# Altium PCB PCB1.PcbDoc
Units mil, origin at the board's own origin, x right, y up, seen from the top; angles counter-clockwise.
Board outline 3950 x 5505 mil, 2 copper layers (Top Layer, Bottom Layer); 12 components, 35 nets, 128 pads, 0 vias.
Unrouted connection lines stored in the file: 45.
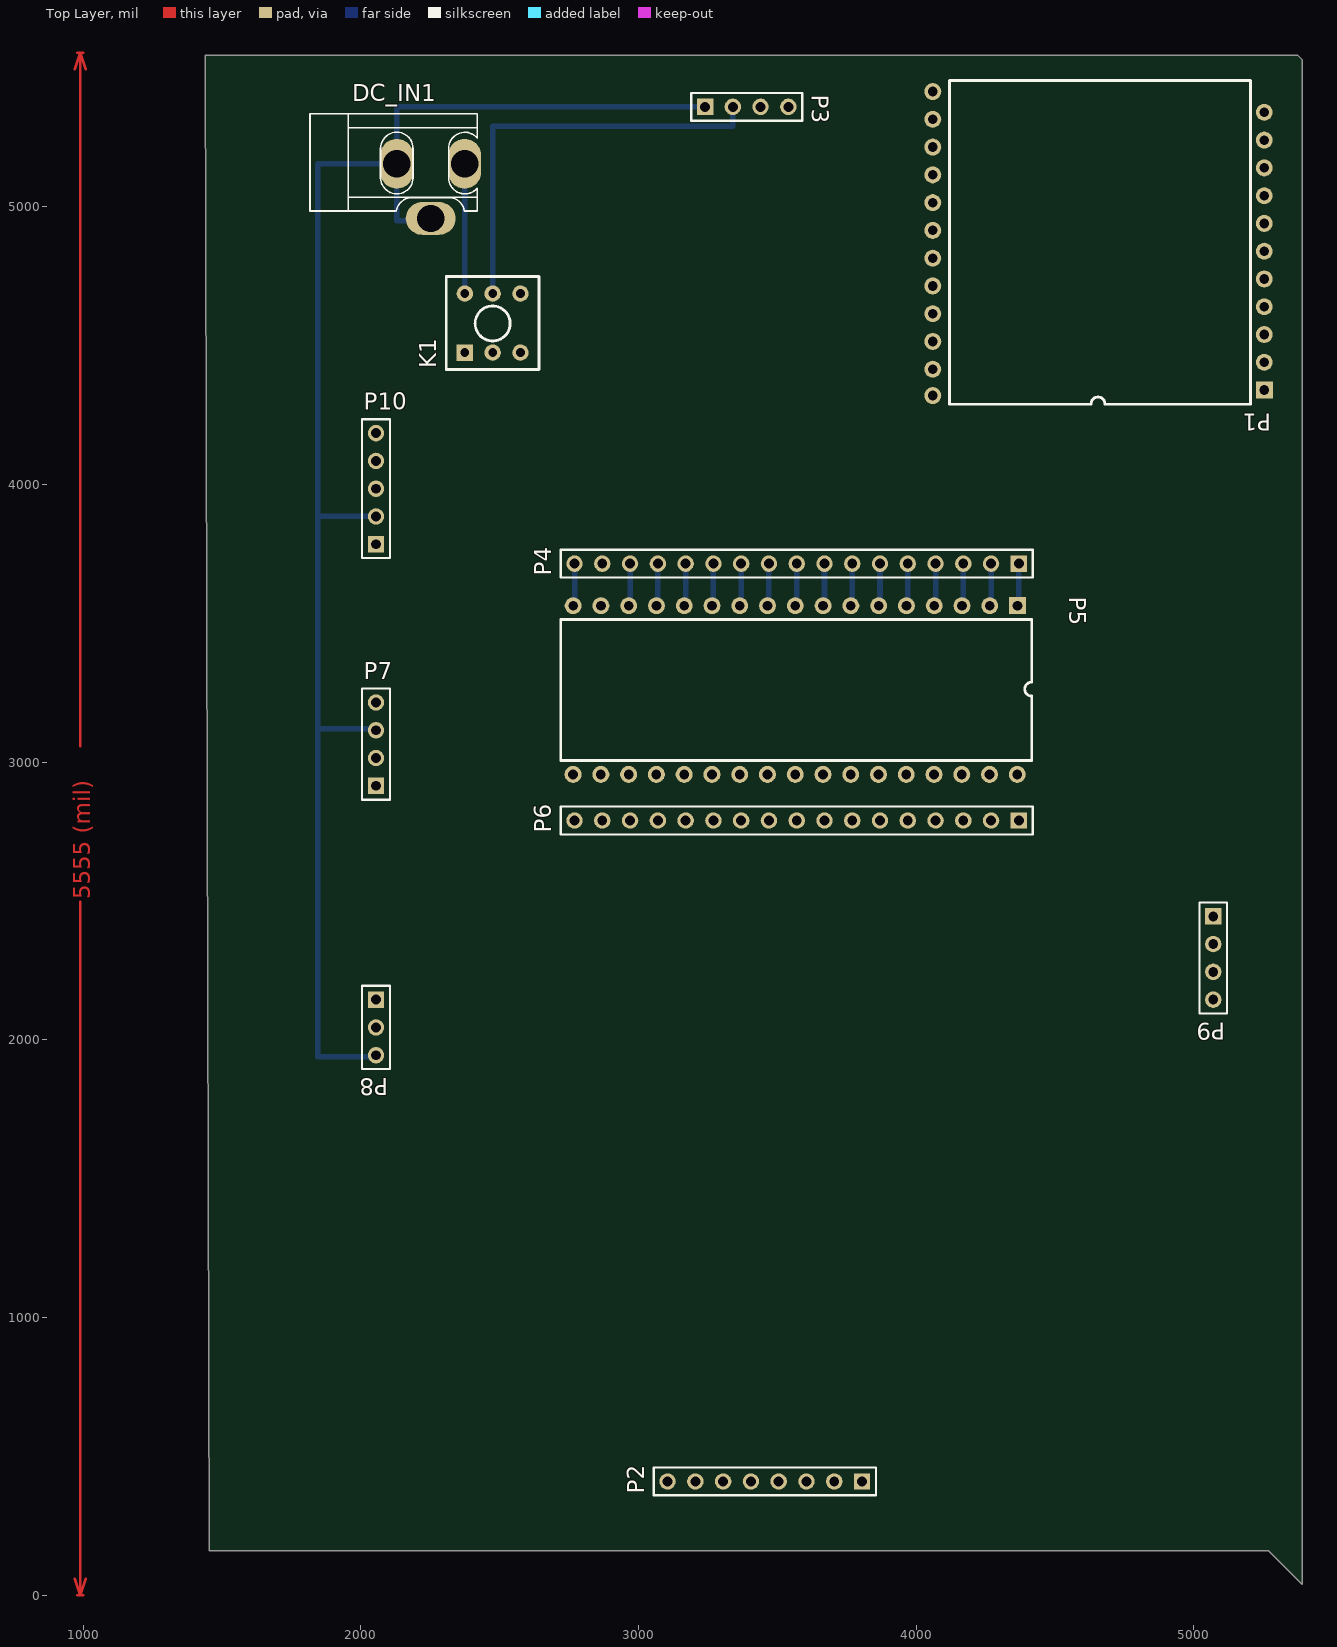
[diagram p0: Top Layer view]
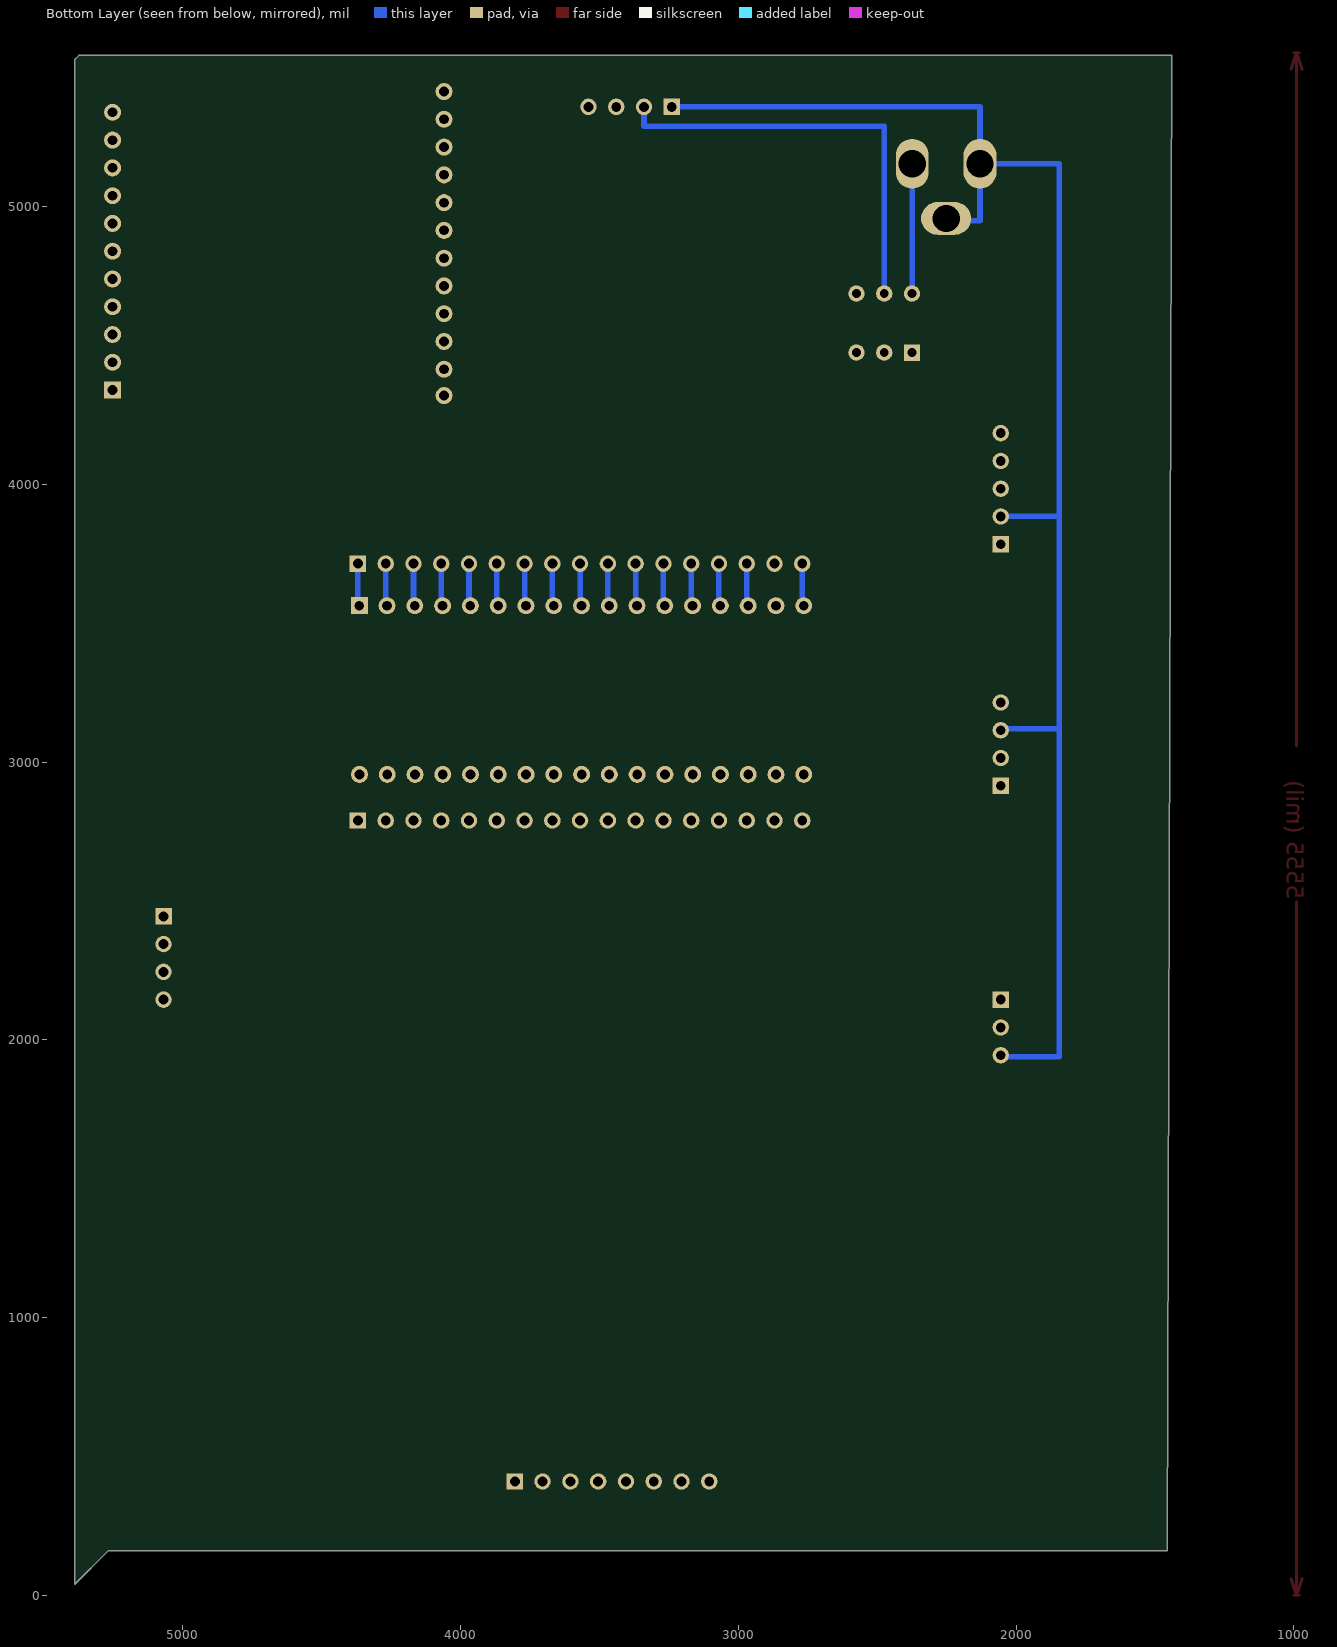
[diagram p1: Bottom Layer view, seen from below]

## Layer stack, top to bottom
Top Layer: signal copper 1.4
Dielectric: dielectric 12.6, FR-4, Dk 4.8
Bottom Layer: signal copper 1.4

## Board outline
1440,5545 5375,5545 5390,5530 5390,40 5270,160 1455,160

## Design rules (kind name [scope] priority, off if disabled: settings)
Clearance [All] p1: gap=10
PolygonConnect [All] p1: connectstyle=Relief reliefconductorwidth=10 reliefentries=4 polygonreliefangle="90 Angle" airgapwidth=10
RoutingCorners [All] p1: cornerstyle=90-Degree minsetback=100 maxsetback=100
RoutingVias [All] p1: holewidth=28 width=50 viastyle="Through Hole" minholewidth=28 minwidth=50 maxholewidth=28 maxwidth=50
SolderMaskExpansion [All] p1: expansion=4
Width [All] p1: maxlimit=30 minlimit=10 preferedwidth=15
27 further rules are at their usual default settings.

## Components (designator, comment, footprint, x,y, rotation, side; value= is the part's Value field where it differs from the comment)
DC_IN1 "POW" DC10B 1955,4985 r0 top
K1 "BUTTON" BTN8.5*8.5 2375,4475 r90 top
P1 "NBLOT" NBLOT 4060,5325 r180 top
P2 "矩阵按键" HDR1X8 3805,410 r180 top
P3 "oled接口" HDR1X4 3240,5360 r0 top
P4 "Header 17" HDR1X17 4370,3715 r180 top
P5 "STM32F103RCT6" stm32最小系统 3410,3260 r270 top
P6 "Header 17" HDR1X17 4370,2790 r180 top
P7 "MQ" HDR1X4 2055,2915 r90 top
P8 "蜂鸣器" HDR1X3 2055,2145 r270 top
P9 "调试" HDR1X4 5070,2445 r270 top
P10 "GPS" HDR1X5 2055,3785 r90 top

## Footprints (in the part's own frame and the unit in brackets; to place one, negate y for a bottom-side part, rotate by r counter-clockwise, add the part's x,y. Pads: shape width x height; smd on the part's side, far side on the other; paste and mask are expansions set on the pad)
BTN8.5*8.5 [mm]
  rect 1.5x1.5 hole 0.8: 1(0,0)
  round 1.5 hole 0.8: 2(0,-2.54) 3(0,-5.08) 4(5.4,-5.08) 5(5.4,-2.54) 6(5.4,0)
  silkscreen extent -1.55,-6.79 6.95,1.71
DC10B [mm]
  oval 3x4.572 hole 2.5: 1(10.645,4.318) 2(4.445,4.318)
  oval 4.572x3 hole 2.5: 3(7.545,-0.682)
  silkscreen extent -3.5,0 11.81,8.89
HDR1X3 [mm] "Connector; Header; 3 Position"
  rect 1.5x1.5 hole 0.9: 1(0,0)
  round 1.5 hole 0.9: 2(2.54,0) 3(5.08,0)
  silkscreen extent -1.27,-1.27 6.35,1.27
HDR1X4 [mm] "Connector; Header; 4 Position"
  rect 1.5x1.5 hole 0.9: 1(0,0)
  round 1.5 hole 0.9: 2(2.54,0) 3(5.08,0) 4(7.62,0)
  silkscreen extent -1.27,-1.27 8.89,1.27
HDR1X5 [mm] "Connector; Header; 5 Position"
  rect 1.5x1.5 hole 0.9: 1(0,0)
  round 1.5 hole 0.9: 2(2.54,0) 3(5.08,0) 4(7.62,0) 5(10.16,0)
  silkscreen extent -1.27,-1.27 11.43,1.27
HDR1X8 [mm] "Connector; Header; 8 Position"
  rect 1.5x1.5 hole 0.9: 1(0,0)
  round 1.5 hole 0.9: 2(2.54,0) 3(5.08,0) 4(7.62,0) 5(10.16,0) 6(12.7,0) 7(15.24,0) 8(17.78,0)
  silkscreen extent -1.27,-1.27 19.05,1.27
HDR1X17 [mm] "Connector; Header; 17 Position"
  rect 1.5x1.5 hole 0.9: 1(0,0)
  round 1.5 hole 0.9: 2(2.54,0) 3(5.08,0) 4(7.62,0) 5(10.16,0) 6(12.7,0) 7(15.24,0) 8(17.78,0) 9(20.32,0) 10(22.86,0) 11(25.4,0) 12(27.94,0) 13(30.48,0) 14(33.02,0) 15(35.56,0) 16(38.1,0) 17(40.64,0)
  silkscreen extent -1.27,-1.27 41.91,1.27
NBLOT [mil]
  round 61 hole 35: 1(0,-90) 2(0,9.98) 3(0,109.96) 4(0,209.93) 5(0,309.91) 6(0,409.89) 7(0,509.87) 8(0,609.85) 9(0,709.82) 10(0,809.8) 11(0,909.78) 12(0,1004.78) 14(-1193.62,884.95) 15(-1193.62,784.93) 16(-1193.62,684.91) 17(-1193.62,584.89) 18(-1193.62,484.87) 19(-1193.62,384.85) 20(-1193.62,284.83) 21(-1193.62,184.81) 22(-1193.62,84.79) 23(-1193.62,-15.23)
  rect 61x61 hole 35: 13(-1193.88,984.97)
  silkscreen extent -1144,-130 -60,1036
stm32最小系统 [mil]
  rect 61x61 hole 35: 1(-303.88,955.19)
  round 61 hole 35: 2(303.87,954.39) 3(-303.63,855.17) 4(303.87,854.42) 5(-303.63,755.15) 6(303.87,754.44) 7(-303.63,655.13) 8(303.87,654.46) 9(-303.63,555.11) 10(303.87,554.48) 11(-303.63,455.09) 12(303.87,454.5) 13(-303.62,355.07) 14(303.87,354.53) 15(-303.62,255.05) 16(303.87,254.55) 17(-303.62,155.03) 18(303.88,154.57) 19(-303.62,55.01) 20(303.88,54.59) 21(-303.62,-45.01) 22(303.88,-45.39) 23(-303.62,-145.03) 24(303.88,-145.36) 25(-303.62,-245.05) 26(303.88,-245.34) 27(-303.62,-345.07) 28(303.88,-345.32) 29(-303.62,-445.09) 30(303.88,-445.3) 31(-303.62,-545.11) 32(303.88,-545.28) 33(-303.62,-645.13) 34(303.88,-645.25)
  silkscreen extent -254,-690 254,1006, body extent -346,-885 346,1111, height 189

## Part data
P1: library part "Header 12X2", "Header, 12-Pin, Dual row"
P2: library part "Header 8", "Header, 8-Pin"
P3 P7 P9: library part "Header 4", "Header, 4-Pin"
P4 P6: "Header, 17-Pin"
P5: library part "Header 17X2", "Header, 17-Pin, Dual row"
P8: library part "Header 3", "Header, 3-Pin"
P10: library part "Header 5", "Header, 5-Pin"

## Nets (pads, with @x,y where several pads share a name; then routed paths per layer and width w, separated by ;. In a path a pad name is that pad's centre, name@x,y a point inside that pad or via, vN(x,y) a via of type N, cw(c..) or ccw(c..) an arc to the next point about the centre after c; other vN are vias at no path point)
A0: P5.24 P6.12 P8.2
A1: P5.22 P6.11 P7.1
A2: P5.20 P6.10 P9.3
A3: P5.18 P6.9 P9.2
A4: P2.1 P5.16 P6.8
A5: P2.2 P5.14 P6.7
A6: P2.3 P5.12 P6.6
A7: P2.4 P5.10 P6.5
A8: P4.5 P5.9 | length 153.4
  Bottom Layer w20: P5.9 3970,3568.52 P4.5
A9: P4.6 P5.11 P10.4 | length 153.4
  Bottom Layer w20: P5.11 3870,3568.54 P4.6
A10: P4.7 P5.13 P10.3 | length 153.4
  Bottom Layer w20: P5.13 3770,3568.56 P4.7
A11: P3.3 P4.8 P5.15 | length 153.4
  Bottom Layer w20: P5.15 3670,3568.58 P4.8
A12: P3.4 P4.9 P5.17 | length 153.4
  Bottom Layer w20: P5.17 3570,3568.6 P4.9
A15: P4.10 P5.19 | length 153.4
  Bottom Layer w20: P5.19 3470,3568.62 P4.10
B0: P5.8 P6.4
B1: P5.6 P6.3
B3: P4.11 P5.21 | length 153.5
  Bottom Layer w20: P5.21 3370,3568.63 P4.11
B4: P4.12 P5.23 | length 153.5
  Bottom Layer w20: P5.23 3270,3568.65 P4.12
B5: P4.13 P5.25 | length 153.5
  Bottom Layer w20: P5.25 3170,3568.67 P4.13
B6: P2.5 P4.14 P5.27 | length 153.5
  Bottom Layer w20: P5.27 3070,3568.69 P4.14
B7: P2.6 P4.15 P5.29 | length 153.5
  Bottom Layer w20: P5.29 2970,3568.71 P4.15
B8: P2.7 P5.32 P6.16
B9: P2.8 P5.30 P6.15
B10: P1.7 P5.4 P6.2
B11: P1.6 P5.2 P6.1
B12: P4.1 P5.1 | length 153.1
  Bottom Layer w20: P5.1 4370,3568.69 P4.1
B13: P4.2 P5.3 | length 153.4
  Bottom Layer w20: P5.3 4270,3568.46 P4.2
B14: P4.3 P5.5 | length 153.4
  Bottom Layer w20: P5.5 4170,3568.48 P4.3
B15: P4.4 P5.7 | length 153.4
  Bottom Layer w20: P5.7 4070,3568.5 P4.4
C13: P5.28 P6.14
GND: DC_IN1.2 DC_IN1.3 P1.11 P1.12 P3.1 P5.34 P6.17 P7.3 P8.3 P9.4 P10.2 | length 5779.6
  Bottom Layer w20: P8.3 2050,1940 1845,1940 1845,3120 ; P7.3 2050,3120 1845,3120 ; P10.2 1845,3885 ; DC_IN1.3 2243.9,4950 2130,4950 DC_IN1.2 ; P3.1 2130,5360 DC_IN1.2 ; 1845,3120 1845,3885 ; 1845,3885 1845,5155 DC_IN1.2
NetDC_IN1_1: DC_IN1.1 K1.6 | length 467.8
  Bottom Layer w20: DC_IN1.1 2374.09,4688.5 K1.6
PPS: P10.5
RST: P5.26 P6.13
VCC_5V: K1.5 P1.13 P3.2 P4.17 P5.33 P7.4 P8.1 P9.1 P10.1 | length 1690.9
  Bottom Layer w20: K1.5 2475,5290 3340,5290 P3.2 ; P5.33 2770,3568.75 P4.17
pads on no net: K1.1 K1.2 K1.3 K1.4 P1.1 P1.2 P1.3 P1.4 P1.5 P1.8 P1.9 P1.10 P1.14 P1.15 P1.16 P1.17 P1.18 P1.19 P1.20 P1.21 P1.22 P1.23 P4.16 P5.31 P7.2
copper on no net: | length 5286.2
  Top Layer w10: 970,60 990,0 ; 970,5495 990,5555 ; 980,0 1000,0 ; 980,5555 1000,5555 ; 990,2496.59 990,0 ; 990,3058.41 990,5555 ; 1010,60 990,0 ; 1010,5495 990,5555

## Other copper
Top Layer:
  text "5555 (mil)" at 1025.99,2506.59 h60 r90

## Dimensions
1435.95,6005.99 to 5375.95,5980.99 on Top Layer